# Altium PCB SmartDice-3rd.PcbDoc
Units mm, origin at the board's own origin, x right, y up, seen from the top; angles counter-clockwise.
Board outline 15.32 x 22.91 mm, 2 copper layers (Top Layer, Bottom Layer); 14 components, 17 nets, 117 pads, 28 vias.
Unrouted connection lines stored in the file: 2.
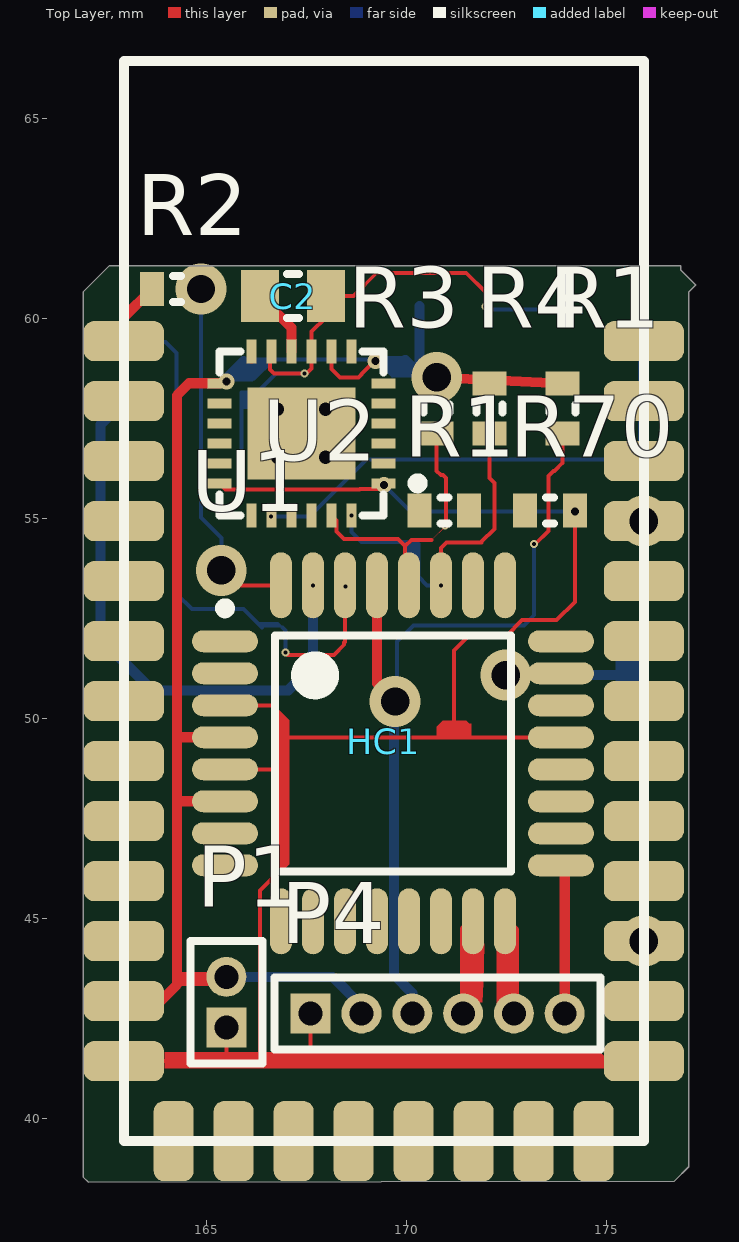
[diagram p0: Top Layer view]
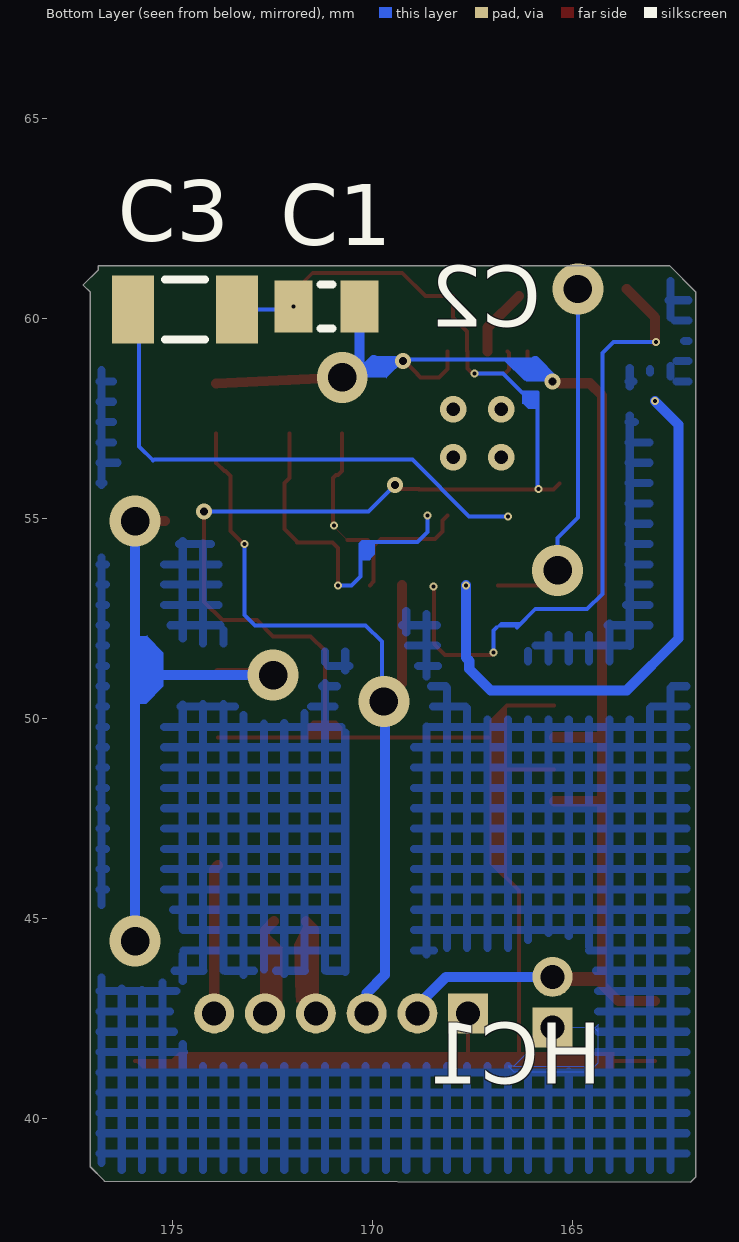
[diagram p1: Bottom Layer view, seen from below]
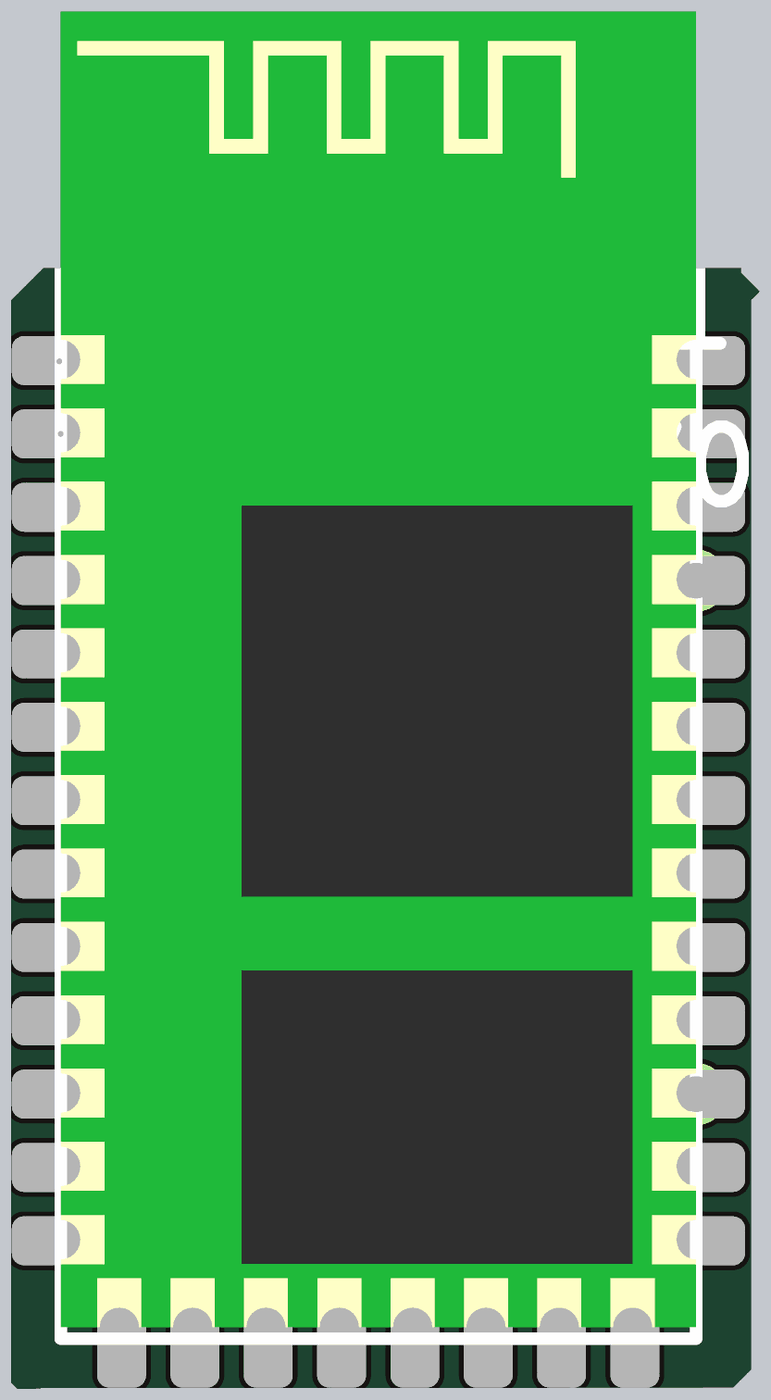
[diagram p2: 3D render of the assembled board from above, using the file's embedded part models]

## Layer stack, top to bottom
Top Solder: solder mask 0.0102, Solder Resist, Dk 3.5
Top Layer: signal copper 0.0356
Dielectric 1: dielectric 0.32, FR-4, Dk 4.8
Bottom Layer: signal copper 0.0356
Bottom Solder: solder mask 0.0102, Solder Resist, Dk 3.5

## Board outline
162.052,38.405 161.925,38.532 161.925,60.554 161.925,60.655 162.585,61.316 176.86,61.316 176.86,61.214 177.241,60.833 177.063,60.655 177.063,38.938 177.063,38.786 176.708,38.43

## Design rules (kind name [scope] priority, off if disabled: settings)
Clearance Clearance_2 [InPolygon] p1: gap=0.5
Clearance Clearance_1 [(OnLayer('Keep-Out Layer'))] p2: gap=0
Clearance [All] p3: gap=0.2
ComponentClearance [All] p1 off: gap=0.254 collisioncheckmode=3 verticalgap=0.254 showdistances=FALSE
HoleSize [All] p1: absolutevalues=TRUE maxlimit=5 minlimit=0.025 maxpercent=80.000 minpercent=20.000
MinimumSolderMaskSliver [All] p1 off: minsoldermaskwidth=0.254
PolygonConnect [All] p1: connectstyle=Relief reliefconductorwidth=0.254 reliefentries=4 polygonreliefangle="90 Angle" airgapwidth=0.254
RoutingVias [All] p1: holewidth=0.5 width=0.8 viastyle="Through Hole" minholewidth=0.5 minwidth=0.8 maxholewidth=0.5 maxwidth=0.8
SilkToSilkClearance [All] p1 off: silktosilkclearance=0.254
SilkToSolderMaskClearance [IsPad] p1 off: minsilkscreentomaskgap=0.254 clearancetoexposedcopper=TRUE
SolderMaskExpansion [All] p1: expansion=0.102
Width [All] p1: maxlimit=5 minlimit=0.1 preferedwidth=0.3
24 further rules are at their usual default settings.

## Classes and differential pairs
component class SmartDice-3rd: C1 C2 C3 HC1 P1 P4 R1 R2 R3 R4 R70 U1 U2

## Components (designator, comment, footprint, x,y, rotation, side; value= is the part's Value field where it differs from the comment)
C1 "100nF" SMD_CAP_0805 171.983,60.3 r180 bottom
C2 "100nF" SMD_CAP_0805 166.345,60.554 r0 top
C3 "2.2nf" SMD_CAP_1206 175.997,60.223 r180 bottom
HC1 "HC-05 Bluetooth" HC-05 169.443,49.428 r0 top
P1 "MHDR1X2" MHDR1X2 165.506,42.266 r90 top
P4 "Programmer" MHDR1X6 167.615,42.621 r0 top
R1 "330" "RES 0603 (1608X06L)" 173.914,58.369 r270 top
R1 "10k" "RES 0603 (1608X06L)" 171.577,55.194 r180 top
R2 "330" "RES 0603 (1608X06L)" 164.897,60.731 r180 top
R3 "4.7k" "RES 0603 (1608X06L)" 170.764,58.369 r270 top
R4 "4.7k" "RES 0603 (1608X06L)" 172.085,58.369 r270 top
R70 "LED" "RES 0603 (1608X06L)" 174.219,55.194 r180 top
U1 "ATmega8-16AC" 32A_N 169.672,49.124 r0 top
U2 "Mpu6050" Mpu6050 167.386,57.125 r180 top

## Footprints (in the part's own frame and the unit in brackets; to place one, negate y for a bottom-side part, rotate by r counter-clockwise, add the part's x,y. Pads: shape width x height; smd on the part's side, far side on the other; paste and mask are expansions set on the pad)
32A_N [mm] "Thin QFP, 32-Leads, Body 7x7mm, Pitch 0.8mm, IPC Medium Density"
  oval 1.65x0.55 smd: 1(-4.2,2.8) 2(-4.2,2) 3(-4.2,1.2) 4(-4.2,0.4) 5(-4.2,-0.4) 6(-4.2,-1.2) 7(-4.2,-2) 8(-4.2,-2.8) 17(4.2,-2.8) 18(4.2,-2) 19(4.2,-1.2) 20(4.2,-0.4) 21(4.2,0.4) 22(4.2,1.2) 23(4.2,2) 24(4.2,2.8)
  oval 0.55x1.65 smd: 9(-2.8,-4.2) 10(-2,-4.2) 11(-1.2,-4.2) 12(-0.4,-4.2) 13(0.4,-4.2) 14(1.2,-4.2) 15(2,-4.2) 16(2.8,-4.2) 25(2.8,4.2) 26(2,4.2) 27(1.2,4.2) 28(0.4,4.2) 29(-0.4,4.2) 30(-1.2,4.2) 31(-2,4.2) 32(-2.8,4.2)
  silkscreen extent -4.32,-2.95 2.95,3.75, body extent -3.5,-3.5 3.5,3.5, height 1.2
HC-05 [mm]
  rrect50% 2x1 smd: 1(-6.5,10) 2(-6.5,8.5) 3(-6.5,7) 4(-6.5,5.5) 5(-6.5,4) 6(-6.5,2.5) 7(-6.5,1) 8(-6.5,-0.5) 9(-6.5,-2) 10(-6.5,-3.5) 11(-6.5,-5) 12(-6.5,-6.5) 13(-6.5,-8) 22(6.5,-8) 23(6.5,-6.5) 24(6.5,-5) 25(6.5,-3.5) 26(6.5,-2) 27(6.5,-0.5) 28(6.5,1) 29(6.5,2.5) 30(6.5,4) 31(6.5,5.5) 32(6.5,7) 33(6.5,8.5) 34(6.5,10)
  rrect50% 1x2 smd: 14(-5.254,-10) 15(-3.754,-10) 16(-2.254,-10) 17(-0.754,-10) 18(0.746,-10) 19(2.246,-10) 20(3.746,-10) 21(5.246,-10)
  silkscreen extent -6.5,-10 6.5,17, body extent -6.5,-9.77 6.5,17.13, height 2.5
MHDR1X2 [mm] "Connector; Header; 2 Position"
  rect 1x1 hole 0.6: 1(0,0)
  round 1 hole 0.6: 2(1.27,0)
  silkscreen extent -0.9,-0.9 2.17,0.9
MHDR1X6 [mm] "Connector; Header; 6 Position"
  rect 1x1 hole 0.6: 1(0,0)
  round 1 hole 0.6: 2(1.27,0) 3(2.54,0) 4(3.81,0) 5(5.08,0) 6(6.35,0)
  silkscreen extent -0.9,-0.9 7.25,0.9
Mpu6050 [mm] "QFN, 24-Leads, Body 4.1x4.1mm (max), Pitch 0.50mm, IPC Medium Density"
  rect 0.6x0.25 smd: 1(-2.05,1.25) 2(-2.05,0.75) 3(-2.05,0.25) 4(-2.05,-0.25) 5(-2.05,-0.75) 6(-2.05,-1.25) 13(2.05,-1.25) 14(2.05,-0.75) 15(2.05,-0.25) 16(2.05,0.25) 17(2.05,0.75) 18(2.05,1.25)
  rect 0.25x0.6 smd: 7(-1.25,-2.05) 8(-0.75,-2.05) 9(-0.25,-2.05) 10(0.25,-2.05) 11(0.75,-2.05) 12(1.25,-2.05) 19(1.25,2.05) 20(0.75,2.05) 21(0.25,2.05) 22(-0.25,2.05) 23(-0.75,2.05) 24(-1.25,2.05)
  rect 2.7x2.3 smd: 25(0,0)
  silkscreen extent -3.03,-2.05 2.05,2.05, body extent -2.05,-2.05 2.05,2.05, height 1
"RES 0603 (1608X06L)" [mm] "Chip Resistor, 2-Leads, Body 1.6x0.8mm, IPC High Density _ (0.063W)"
  rect 0.6x0.85 smd: 1(0,0) 2(1.244,0)
  silkscreen extent 0.52,-0.33 0.72,0.33, body extent -0.14,-0.38 1.38,0.38, height 0.45
SMD_CAP_0805 [mm]
  rect 0.95x1.3 smd: 1(0,0) 2(1.65,0)
  silkscreen extent 0.67,-0.55 0.97,0.55, body extent -0.19,-0.64 1.84,0.63, height 0.65
SMD_CAP_1206 [mm]
  rect 1.05x1.7 smd: 1(0,0) 2(2.596,0)
  silkscreen extent 0.8,-0.75 1.8,0.75, body extent -0.22,-0.77 2.82,0.75, height 0.75

## Part data
C1 C2 C3: library part Cap-Bipolar, "Bipolar Capacitor"
P1: "Header, 2-Pin"
P4: library part MHDR1X6, "Header, 6-Pin"
R1 R1 R2 R3 R4 R70: library part Resistor, "Resistor"
U1: "8-Bit AVR Microcontroller with 8K Bytes of In-System Programmable Flash Memory"

## Via types
v1: diameter 0.2, hole 0.1, Top Layer to Bottom Layer, 13 vias
v2: diameter 1.27, hole 0.711, Top Layer to Bottom Layer, 7 vias
v3: diameter 0.4, hole 0.2, Top Layer to Bottom Layer, 4 vias
v4: diameter 0.66, hole 0.33, Top Layer to Bottom Layer, tented top, 4 vias

## Nets (pads, with @x,y where several pads share a name; then routed paths per layer and width w, separated by ;. In a path a pad name is that pad's centre, name@x,y a point inside that pad or via, vN(x,y) a via of type N, cw(c..) or ccw(c..) an arc to the next point about the centre after c; other vN are vias at no path point)
GND: C1.1 C2.2 C3.2 HC1.13 HC1.22 P1.1 P4.1 R70.1 U1.3 U1.5 U1.21 U2.1 U2.9 U2.11 U2.18 | length 65.2
  Top Layer w0.1: HC1.13 164.669,41.428 164.668,41.427 165.506,41.427 ; U2.18 165.486,55.725 168.84,55.725 168.843,55.728 169.289,55.728 U2.1 169.443,55.867 v3(169.443,55.829) ; U1.5 166.999,48.724 167.03,48.692 ; U1.3 166.643,50.324 167.03,49.936 167.03,49.524 ; P1.1 165.506,41.427 ; 166.345,41.504 166.347,41.506 166.347,45.691 167.03,46.374 167.03,48.692 ; U2.11 166.599,59.137 166.599,58.725 166.7,58.623 v1(167.462,58.623) 167.513,58.623 167.636,58.746 U2.9 167.64,59.179 167.64,59.665 167.995,60.019 C2.2 168.681,60.554 169.266,61.138 171.501,61.138 171.983,60.655 v1(171.983,60.3) ; P4.1 167.615,41.453 167.64,41.427 ; U1.21 171.196,49.524 ; R70.1 v3(174.219,55.169) 174.219,52.908 173.761,52.451 172.898,52.451 172.491,52.045 171.552,52.045 171.196,51.689 171.196,49.524 ; HC1.22 HC1.22 167.64,41.427 ; 165.506,41.427 167.64,41.427 ; 167.03,48.692 167.03,49.524 ; 167.03,49.524 171.196,49.524
  Bottom Layer w0.1: v1(165.862,55.728) 165.887,55.753 165.887,58.141 166.266,58.141 166.749,58.623 v1(167.462,58.623) ; v3(169.443,55.829) 170.104,55.169 v3(174.219,55.169) ; v1(171.983,60.3) 172.06,60.223 C3.2
MISO: P4.5 U1.16 | length 2.4
  Top Layer w0.254: U1.16 172.695,44.701 P4.5
MOSI: P4.4 U1.15 | length 2.4
  Top Layer w0.254: P4.4 171.474,42.671 171.474,44.726 U1.15
MPU-INT: U1.1 U2.12 | length 0.3
  Top Layer w0.1: U2.12@166.136,58.923 U2.12
NetC2_1: C2.1 U2.10 | length 1.7
  Top Layer w0.254: C2.1 167.136,59.762 U2.10
NetC3_1: C3.1 U2.20 | length 13.5
  Bottom Layer w0.1: v1(166.624,55.042) 167.589,55.042 169.012,56.464 175.463,56.464 175.489,56.439 175.844,56.794 175.844,60.071 C3.1
NetHC1_24: HC1.24 HC1.31 U1.23 | length 16.1
  Top Layer w0.254: v2(172.491,51.079) 172.536,51.124 U1.23 ; HC1.31@175.197,54.928 v2(175.943,54.928)
  Bottom Layer w0.254: v2(172.491,51.079) 175.943,51.079 ; v2(175.943,44.428) 175.943,51.079 ; v2(175.943,54.928) 175.943,51.079
NetR1_1: U1.25
NetR1_2: R70.2
NetR2_1: R2.1 U1.32 | length 8.9
  Top Layer w0.1: v2(165.379,53.696) 165.751,53.324 U1.32
  Bottom Layer w0.1: v2(164.871,60.731) 164.871,55.016 165.379,54.508 v2(165.379,53.696)
RES: P4.3 R1.2@173.914,57.125 U1.29 | length 21.1
  Top Layer w0.1: v1(173.203,54.356) 173.228,54.356 173.558,54.686 173.558,56.058 173.685,56.185 173.711,56.185 173.914,56.388 R1.2@173.914,57.125
  Top Layer w0.254: U1.29 169.272,50.87 v2(169.723,50.419)
  Bottom Layer w0.1: v2(169.723,50.419) 169.774,50.47 169.774,51.918 170.18,52.324 172.949,52.324 173.203,52.578 v1(173.203,54.356)
  Bottom Layer w0.254: v2@169.697,50.394 169.697,43.586 170.155,43.129 P4.3
RXD: HC1.2 U1.31 | length 14.3
  Bottom Layer w0.254: v1(162.943,57.928) 162.357,57.342 162.357,51.994 163.652,50.698 167.056,50.698 167.589,51.232 167.589,51.435 167.672,51.518 v1(167.672,53.324)
SCK: P4.6 U1.17 | length 3.7
  Top Layer w0.254: U1.17 173.965,46.231 P4.6
SCL: R3.2 U1.28 U2.23 | length 6.5
  Top Layer w0.1: U2.23 168.261,54.95 168.261,54.671 168.449,54.483 169.799,54.483 169.977,54.305 ; U1.28 169.977,53.419 169.977,54.305 ; 170.637,54.458 170.129,54.458 169.977,54.305 ; R3.2 170.764,56.185 170.866,56.083 170.917,56.083 170.993,56.007 v1@170.993,54.806
  other v1: 170.967,54.813
SDA: R4.2 U1.27 U2.24 | length 8.6
  Top Layer w0.1: v1(170.872,53.324) 170.866,53.33 170.866,54.254 171.01,54.399 171.889,54.399 171.889,54.414 172.212,54.737 172.212,55.88 172.085,56.007 R4.2
  Bottom Layer w0.1: v1(168.636,55.075) 168.636,54.655 168.885,54.407 170.256,54.407 170.307,54.356 170.307,53.543 170.527,53.324 v1(170.872,53.324)
TXD: HC1.1 R2.2 U1.30 | length 13
  Top Layer w0.1: 168.453,51.892 168.472,51.911 U1.30
  Top Layer w0.254: HC1.1 162.943,60.022 R2.2
  Bottom Layer w0.1: v1(162.916,59.411) 163.982,59.411 164.262,59.131 164.262,53.111 164.643,52.73 165.938,52.73 166.395,52.273
  other v1: 168.478,53.289
VCC: C1.2 HC1.12 P1.2 P4.2 R1.1@173.914,58.369 R3.1 R4.1 U1.4 U1.6 U2.8 U2.13 | length 37.6
  Top Layer w0.1: U2.8 168.136,58.737 168.348,58.525 168.811,58.525 168.886,58.599 168.886,58.603 169.211,58.928 v3(169.24,58.928)
  Top Layer w0.254: HC1.12 163.858,42.928 164.27,43.341 164.27,43.536 ; 164.29,47.924 U1.6 ; U2.13 164.572,58.375 164.27,58.073 164.27,49.505 ; U1.4 164.289,49.524 164.27,49.505 ; P1.2 164.27,43.536 ; v2(170.764,58.522) 170.772,58.521 172.089,58.457 R1.1@173.914,58.369 ; 164.27,43.536 164.27,49.505
  Bottom Layer w0.1: 165.938,58.928 165.983,58.973 169.195,58.973 v3(169.24,58.928)
  Bottom Layer w0.254: P1.2 168.163,43.536 168.885,42.814 P4.2 ; v3(165.506,58.42) 165.506,58.496 165.938,58.928 ; v3(169.24,58.928) 169.951,58.928 169.977,58.953 170.409,58.522 v2(170.764,58.522) 170.333,58.8 C1.2
pads on no net: HC1.3 HC1.4 HC1.5 HC1.6 HC1.7 HC1.8 HC1.9 HC1.10 HC1.11 HC1.14 HC1.15 HC1.16 HC1.17 HC1.18 HC1.19 HC1.20 HC1.21 HC1.23 HC1.25 HC1.26 HC1.27 HC1.28 HC1.29 HC1.30 HC1.32 HC1.33 HC1.34 R1.1@171.577,55.194 R1.2@170.333,55.194 U1.2 U1.7 U1.8 U1.9 U1.10 U1.11 U1.12 U1.13 U1.14 U1.18 U1.19 U1.20 U1.22 U1.24 U1.26 U2.2 U2.3 U2.4 U2.5 U2.6 U2.7 U2.14 U2.15 U2.16 U2.17 U2.19 U2.21 U2.22 U2.25
copper on no net: | length 2.3
  Top Layer w0.1: v1(166.98,51.638) 167.033,51.585 168.199,51.585 168.453,51.839 168.453,51.892
  Bottom Layer w0.1: 166.903,52.273 166.98,52.197 v1(166.98,51.638)
  other v4: 166.786,56.525 167.986,56.525 166.786,57.725 167.986,57.725

## Polygon pours and split planes (outlines as drawn)
no net on Bottom Layer "Top Layer-No Net" (hatched 90Degree grid 0.508 track 0.203, pour order 10): 162.662,61.036 162.103,60.477 162.103,60.35 162.103,58.039 162.001,57.937 162.255,57.937 162.839,58.522 163.246,58.522 163.246,57.429 163.297,57.379 163.271,57.379 162.712,56.82 162.712,52.349 163.779,51.283 166.167,51.283 166.268,51.181 166.268,51.765 166.141,51.892 165.837,52.197 165.837,52.248 165.735,52.349 164.338,52.349 163.881,52.807 163.881,53.137 164.008,53.264 164.008,58.649 163.703,58.953 163.703,58.979 163.627,59.055 162.763,59.055 162.662,59.157 162.662,59.741 162.611,59.792 162.611,60.985
no net on Bottom Layer "Top Layer-No Net" (hatched 90Degree grid 0.508 track 0.203, pour order 8): 165.506,42.266 166.472,41.3 164.728,41.3 164.592,41.164 164.363,41.393 164.363,42.342 164.44,42.266 165.506,42.266
no net on Bottom Layer "Top Layer-No Net" (hatched 90Degree grid 0.508 track 0.203, pour order 6): 165.506,42.266 166.472,41.3 166.608,41.3 166.472,41.164 164.592,41.164 164.363,41.393 164.363,42.164 164.465,42.266 165.506,42.266
no net on Bottom Layer "Top Layer-No Net" (hatched 90Degree grid 0.508 track 0.203, pour order 4): 162.128,51.384 162.154,51.384 163.474,50.063 167.437,50.063 167.538,49.962 167.538,50.317 168.3,51.079 168.3,52.502 168.123,52.68 169.824,52.68 169.85,52.705 169.85,52.502 169.469,52.121 169.469,51.791 169.215,51.537 169.215,51.511 168.859,51.156 168.859,50.14 168.834,50.114 168.834,49.911 169.266,49.479 169.266,44.145 169.316,44.094 166.294,44.094 165.964,44.425 165.024,44.425 164.922,44.323 164.617,44.323 164.592,44.298 164.592,43.663 164.363,43.434 164.363,41.732 164.795,41.3 174.447,41.3 174.727,41.58 174.727,43.358 174.803,43.434 170.917,43.434 170.688,43.663 170.688,51.13 170.51,51.308 170.51,51.587 170.891,51.968 173.33,51.968 173.406,51.892 173.406,52.426 173.736,52.756 173.736,54.051 174.117,54.432 174.803,54.432 174.904,54.331 174.904,54.229 175.336,53.797 175.336,52.4 174.803,51.867 171.653,51.867 171.12,51.333 171.12,50.952 171.425,50.648 172.009,50.063 172.06,50.063 172.161,50.165 173.431,50.165 173.431,50.571 173.507,50.495 174.6,50.495 174.93,50.165 175.285,50.165 175.336,50.114 175.336,45.542 175.006,45.212 175.006,43.866 175.565,43.307 176.53,43.307 176.784,43.561 176.784,44.018 176.53,44.272 176.53,45.212 176.403,45.339 176.403,54.077 176.759,54.432 176.759,55.601 176.301,56.058 176.276,56.058 176.378,56.159 176.378,58.699 176.835,58.699 176.835,38.938 176.606,38.71 162.458,38.71 162.154,39.014 162.154,51.384

## Other copper
Top Layer:
  rectangle net GND: 163.957,41.25 174.854,41.656
  region net SCL: 170.967,54.813 170.967,54.788 170.637,54.458 170.645,54.458 170.993,54.806 170.975,54.806
  region net GND: 170.739,49.524 170.764,49.549 170.764,49.784 170.917,49.936 171.501,49.936 171.577,49.86 171.628,49.86 171.628,49.524
  region net MOSI: 171.672,44.924 171.425,44.676 171.425,42.621 171.672,42.869 171.907,42.901 171.933,43.383 171.958,44.348
  region net MISO: 172.695,44.701 172.266,44.272 172.237,44.272 172.263,44.247 172.263,42.85 172.491,42.621 172.695,42.621 172.745,42.672 172.745,43.663 172.695,43.713
  region net GND: 174.854,41.656 175.081,41.428 175.943,41.428 175.765,41.25 174.854,41.25
  region net VCC: 164.27,43.341 164.304,43.307 165.405,43.307 165.506,43.409 165.506,43.536 164.414,43.536 164.27,43.392
  region net GND: 166.649,50.317 166.649,45.999 167.024,46.374 167.03,46.374 167.03,49.936
Bottom Layer:
  rectangle: 166.903,52.197 166.98,52.273
  region net TXD: 166.294,52.4 166.802,52.4 166.929,52.273 166.421,52.273
  region net SDA: 170.307,53.95 170.078,53.95 170.078,53.975 169.951,54.102 169.951,54.407 170.256,54.407 170.282,54.381 170.282,54.077 170.307,54.051
  region net SDA: 170.307,54.356 170.256,54.407 169.951,54.407 170.307,54.051
  region net SDA: 169.951,54.407 169.951,54.102 170.053,54 170.053,53.975 170.078,53.95 170.307,53.95
  region net GND: 165.887,58.141 165.887,57.734 166.116,57.734 166.243,57.861 166.268,57.861 166.266,57.935 166.266,58.141
  region net VCC: 165.506,58.42 166.167,58.42 166.192,58.445 166.218,58.445 166.7,58.928 165.938,58.928 165.506,58.496
  region net VCC: 169.24,58.928 169.647,58.522 169.647,58.496 169.672,58.522 170.536,58.522 170.104,58.953 169.977,58.953 169.951,58.928
  region net NetHC1_24: 175.971,50.368 175.666,50.368 175.235,50.8 175.235,51.638 175.641,52.045 175.641,52.07 175.666,52.045 175.92,52.045 175.971,51.994